# Altium PCB power_board.PcbDoc
Units mm, origin at the board's own origin, x right, y up, seen from the top; angles counter-clockwise.
Board outline 100 x 50 mm, 2 copper layers (Top Layer, Bottom Layer); 11 components, 7 nets, 42 pads, 0 vias.
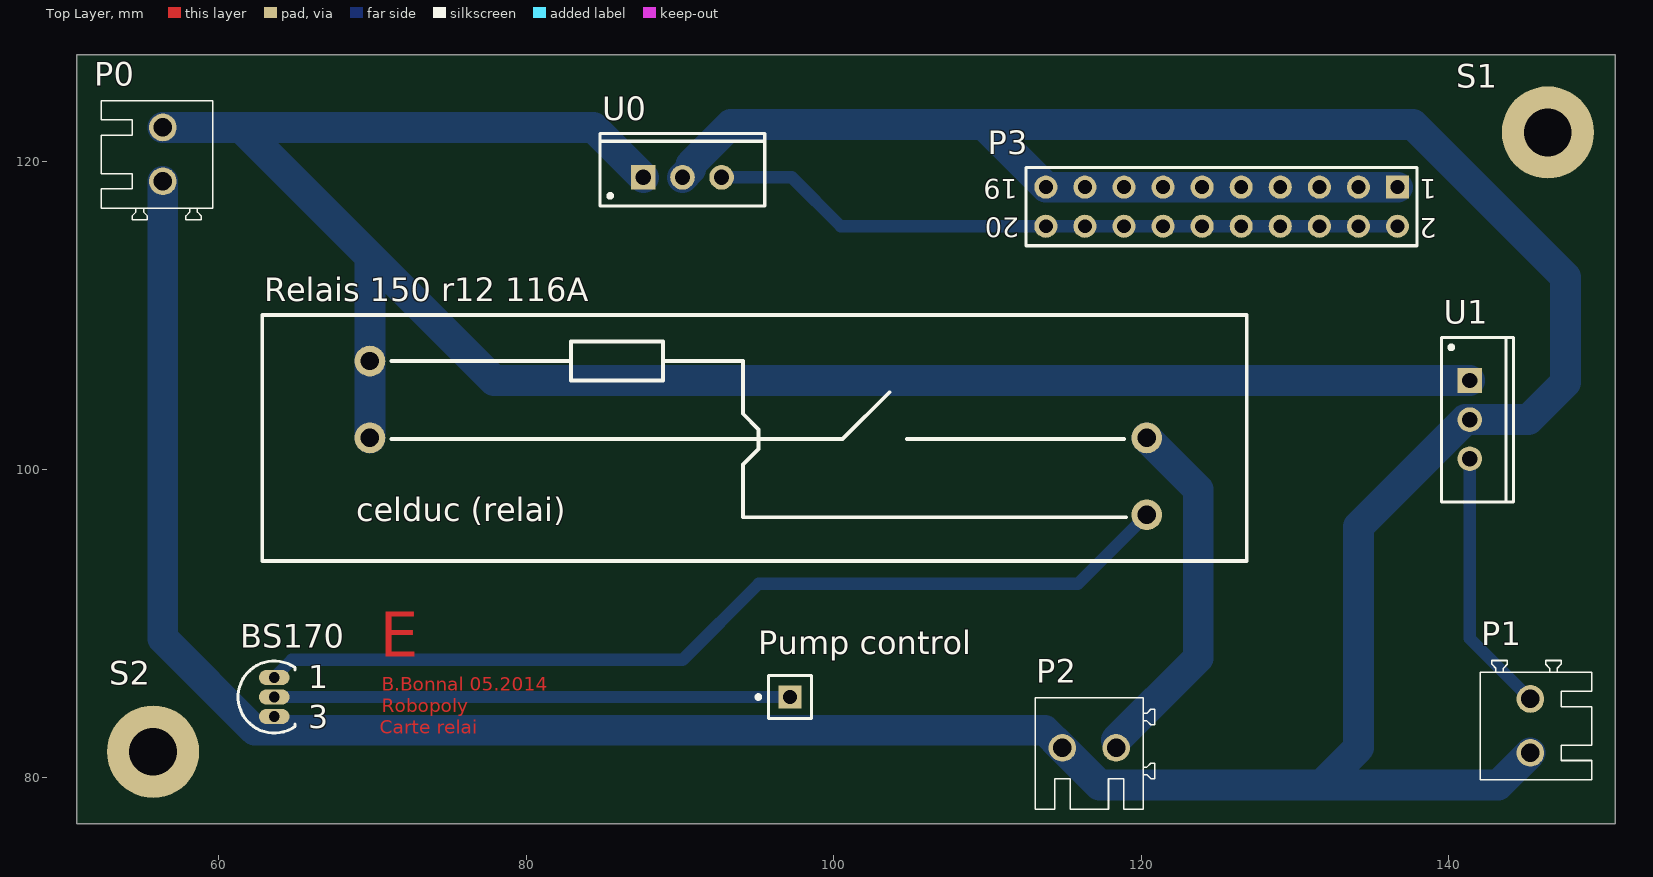
[diagram p0: Top Layer view]
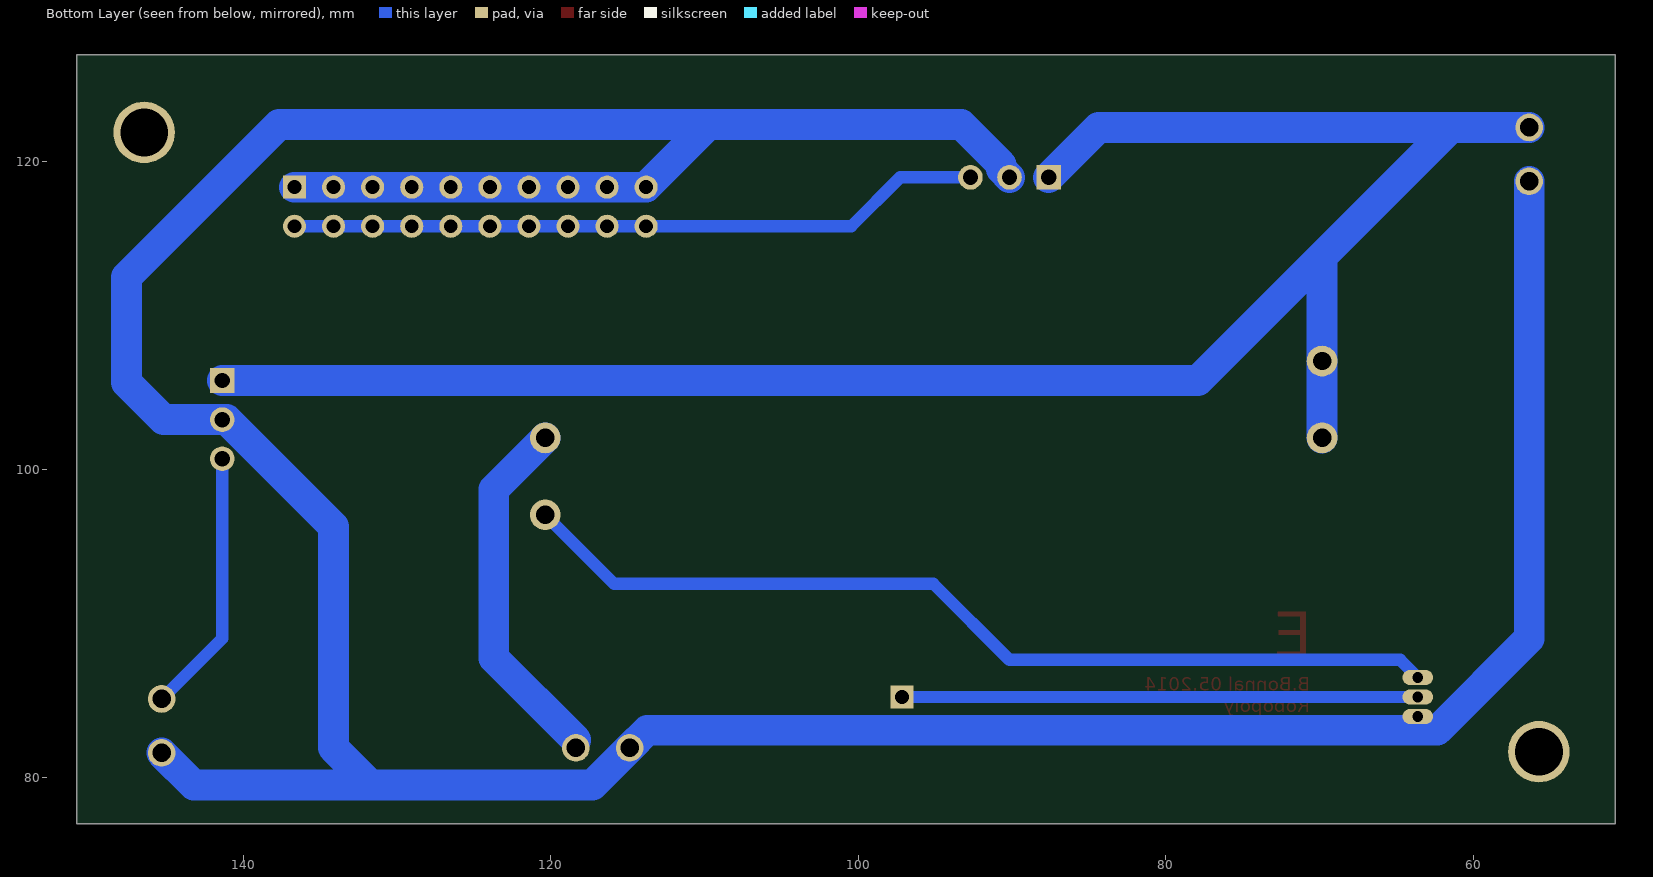
[diagram p1: Bottom Layer view, seen from below]

## Layer stack, top to bottom
Top Layer: signal copper 0.0356
Dielectric: dielectric 0.32, FR-4, Dk 4.8
Bottom Layer: signal copper 0.0356

## Board outline
50.8,76.962 150.8,76.962 150.8,126.962 50.8,126.962

## Design rules (kind name [scope] priority, off if disabled: settings)
Clearance [All] p1: gap=0.15
PlaneConnect [All] p1: planeconnectstyle=Direct reliefexpansion=0.508 reliefentries=4 reliefconductorwidth=0.254 reliefairgap=0.254
PolygonConnect PolygonConnect_nettie [InComponent('nt1') vs InNet('GND')] p1: connectstyle=Direct reliefconductorwidth=0.254 reliefentries=4 polygonreliefangle="90 Angle"
PolygonConnect PolygonConnect_pad [InComponent('U3') vs InNet('GND')] p2: connectstyle=Direct reliefconductorwidth=0.254 reliefentries=4 polygonreliefangle="90 Angle"
PolygonConnect [All] p3: connectstyle=Relief reliefconductorwidth=0.254 reliefentries=4 polygonreliefangle="90 Angle"
RoutingVias [All] p1: holewidth=0.35 width=0.6 viastyle="Through Hole" minholewidth=0.2 minwidth=0.4 maxholewidth=1.2 maxwidth=1
SilkscreenOverComponentPads [All] p1: minsilkscreentomaskgap=0.254
SolderMaskExpansion SolderMaskExpansion_via [IsVia] p1: expansion=-0.5
SolderMaskExpansion [All] p2: expansion=0.102
Width [All] p1: maxlimit=1 minlimit=0.203 preferedwidth=0.203
26 further rules are at their usual default settings.

## Classes and differential pairs
component class "Power Board Roberto 1.0": BS170 P0 P1 P2 P3 "Pump control" "Relais 150 r12 116A" U0 U1

## Components (designator, comment, footprint, x,y, rotation, side; value= is the part's Value field where it differs from the comment)
BS170 "N channel MOS" TO-92 63.627,85.217 r0 top
P0 "Terminal Block 12V" "Phoenix PT 2-Pole" 56.388,118.745 r90 top
P1 "Terminal Block 5V to Shield" "Phoenix PT 2-Pole" 145.288,85.09 r270 top
P2 "Terminal Block Water pump" "Phoenix PT 2-Pole" 118.364,81.915 r180 top
P3 "5V - Gnd Rail" "HEADER 10x2" 136.652,118.364 r180 top
"Pump control" "Input from u" PIN1 97.155,85.217 r90 top
"Relais 150 r12 116A" "celduc Robopoly" "Relais 150 r12 116A" 69.85,107.061 r0 top
S1 "Comment" HW/SCREW/M3 146.431,121.92 r0 top
S2 "Comment" HW/SCREW/M3 55.753,81.661 r0 top
U0 "LM7805CT" T03B 90.17,118.999 r0 top
U1 "LM7805CT" T03B 141.351,103.251 r270 top

## Footprints (in the part's own frame and the unit in brackets; to place one, negate y for a bottom-side part, rotate by r counter-clockwise, add the part's x,y. Pads: shape width x height; smd on the part's side, far side on the other; paste and mask are expansions set on the pad)
"HEADER 10x2" [mm]
  rect 1.5x1.5 hole 0.9: 1(0,0)
  round 1.5 hole 0.9: 2(0,2.54) 3(2.54,0) 4(2.54,2.54) 5(5.08,0) 6(5.08,2.54) 7(7.62,0) 8(7.62,2.54) 9(10.16,0) 10(10.16,2.54) 11(12.7,0) 12(12.7,2.54) 13(15.24,0) 14(15.24,2.54) 15(17.78,0) 16(17.78,2.54) 17(20.32,0) 18(20.32,2.54) 19(22.86,0) 20(22.86,2.54)
  silkscreen extent -1.27,-1.27 24.15,3.81
HW/SCREW/M3 [mm]
  round 6 / inner round 4 / far side round 4 hole 3.1: 1(0,0)
  body extent -2.24,-2.24 2.26,2.26, height 2.5
"Phoenix PT 2-Pole" [mm] "PT 1,5/ 2-3,5-H - Ref 1984617"
  round 1.8 hole 1.2: 1(0,0) 2(3.5,0)
  silkscreen extent -2.5,-3.25 5.25,4, body extent -2.28,-3.1 5.29,4.5, height 9
PIN1 [mm] "Connector; Plug"
  rect 1.5x1.5 hole 0.9: 1(0,0)
  silkscreen extent -1.4,-1.4 1.4,2.17
"Relais 150 r12 116A" [mm] "celduc relai Robopoly"
  round 2 hole 1.2: 0(0,0) 1(0,-5) 2(50.5,-5)
  round 2 hole 1.2 paste+5 mask+0.102: 3(50.5,-10)
  silkscreen extent -7,-13 57,3
T03B [mm] "TO, Thru-Hole, Vertical, Heatsink Mounted; 3 In-Line Leads; Pitch 2.54 mm"
  rect 1.6x1.6 hole 1: 1(-2.54,0)
  round 1.6 hole 1: 2(0,0) 3(2.54,0)
  silkscreen extent -5.35,-1.85 5.35,2.85, body extent -5.4,-1.9 5.4,2.9, height 19.4
TO-92 [mm] "TO, Flat Index; 3 In-Line, Axial Leads; Body Dia. 4.6mm; Leads 0.41 x 0.39 mm (max)"
  oval 2x1 hole 0.7: 1(0,1.27) 2(0,0) 3(0,-1.27)
  silkscreen extent -2.34,-2.34 1.35,2.34

## Part data
BS170: library part NPN1, "N channel MOSfet"
P0 P1 P2: library part "Screw Block 2", "2-Pin Screw Terminal"
P3: library part "HEADER 10x2", "Header, 2-Pin"
"Pump control": library part Socket, "Socket"
"Relais 150 r12 116A": library part "Relai celduc Robopoly", "Relais"
U0 U1: library part LM7808CT, "Series 3-Terminal Positive Regulators, 3-pin TO-220"

## Nets (pads, with @x,y where several pads share a name; then routed paths per layer and width w, separated by ;. In a path a pad name is that pad's centre, name@x,y a point inside that pad or via, vN(x,y) a via of type N, cw(c..) or ccw(c..) an arc to the next point about the centre after c; other vN are vias at no path point)
12V: "Relais 150 r12 116A.0" "Relais 150 r12 116A.1" P0.2 U0.1 U1.1 | length 131.1
  Bottom Layer w2: P0.2 61.468,122.245 ; 69.85,102.061 69.85,107.061 69.85,113.863 ; U0.1 84.384,122.245 61.468,122.245 ; U1.1 77.922,105.791 69.85,113.863 ; 61.468,122.245 69.85,113.863
GND: BS170.3 P0.1 P1.2 P2.2 P3.1 P3.3 P3.5 P3.7 P3.9 P3.11 P3.13 P3.15 P3.17 P3.19 U0.2 U1.2 | length 258.4
  Bottom Layer w1: BS170.3 64.516,83.058 64.643,83.058
  Bottom Layer w2: P0.1 56.388,89.027 62.357,83.058 64.516,83.058 ; 64.643,83.058 113.721,83.058 P2.2 117.277,79.502 131.699,79.502 ; U0.2 90.71,119.539 90.71,119.827 93.311,122.428 109.728,122.428 ; P3.1 P3.3 P3.5 P3.7 P3.9 P3.11 P3.13 P3.15 P3.17 P3.19 109.728,122.428 ; P1.2 143.2,79.502 131.699,79.502 ; 109.728,122.428 137.668,122.428 147.574,112.522 147.574,105.664 145.161,103.251 U1.2 141.063,103.251 134.112,96.3 134.112,81.915 131.699,79.502
NetBS170_1: "Relais 150 r12 116A.3" BS170.1 | length 61.1
  Bottom Layer w0.8: BS170.1 64.77,87.63 90.17,87.63 95.123,92.583 115.872,92.583 120.35,97.061
NetBS170_2: "Pump control.1" BS170.2 | length 33.5
  Bottom Layer w0.8: BS170.2 97.155,85.217
NetP1_1: P1.1 U1.3 | length 17.3
  Bottom Layer w0.8: U1.3 141.351,89.027 P1.1
NetP2_1: "Relais 150 r12 116A.2" P2.1 | length 23.7
  Bottom Layer w0.8: P2.1 P2.1@118.364,82.423
  Bottom Layer w2: P2.1@118.364,82.423 123.698,87.757 123.698,98.713 120.35,102.061
NetP3_2: P3.2 P3.4 P3.6 P3.8 P3.10 P3.12 P3.14 P3.16 P3.18 P3.20 U0.3 | length 45.3
  Bottom Layer w0.8: U0.3 97.282,118.999 100.457,115.824 P3.20 P3.18 P3.16 P3.14 P3.12 P3.10 P3.8 P3.6 P3.4 P3.2
pads on no net: S1.1 S2.1

## Other copper
Top Layer:
  text "E" at 70.485,86.868 h5
  text "B.Bonnal 05.2014" at 70.612,85.344 h1.5
  text "Robopoly" at 70.612,83.947 h1.5
  text "Carte relai" at 70.485,82.55 h1.5

## Silkscreen, mask and mechanical layers (free items; w line width, h text height)
Mechanical 1:
  lines w0.254: 50.8,76.962 50.8,127 150.876,127 150.876,76.962 50.8,76.962

## Text inside footprints (layer, text, board x,y; h text height)
BS170: Top Overlay "1" at 65.851,85.777 h1.5; Top Overlay "3" at 65.851,83.182 h1.5
P3: Top Overlay "20" at 112.077,116.389 h1.27 r180; Top Overlay "19" at 111.977,118.889 h1.27 r180; Top Overlay "1" at 139.192,118.872 h1.27 r180; Top Overlay "2" at 139.192,116.332 h1.27 r180
"Relais 150 r12 116A": Top Overlay "celduc (relai)" at 68.961,96.647 h1.52